# Altium PCB PCB_solderez.PcbDoc
Units mil, origin at the board's own origin, x right, y up, seen from the top; angles counter-clockwise.
Board outline 2995 x 1245 mil, 2 copper layers (Top Layer, Bottom Layer); 8 components, 11 nets, 53 pads, 0 vias.
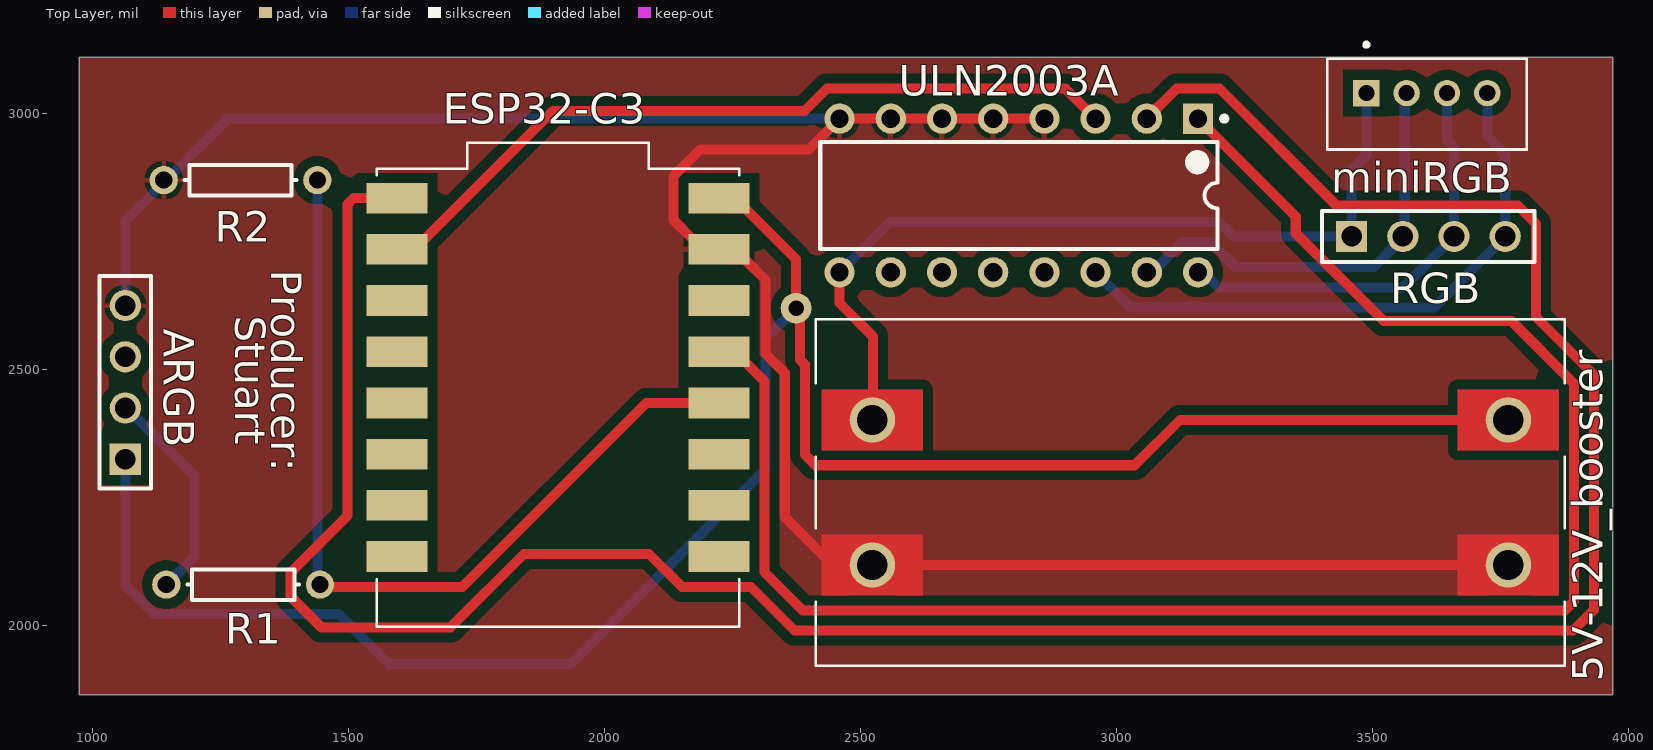
[diagram p0: Top Layer view]
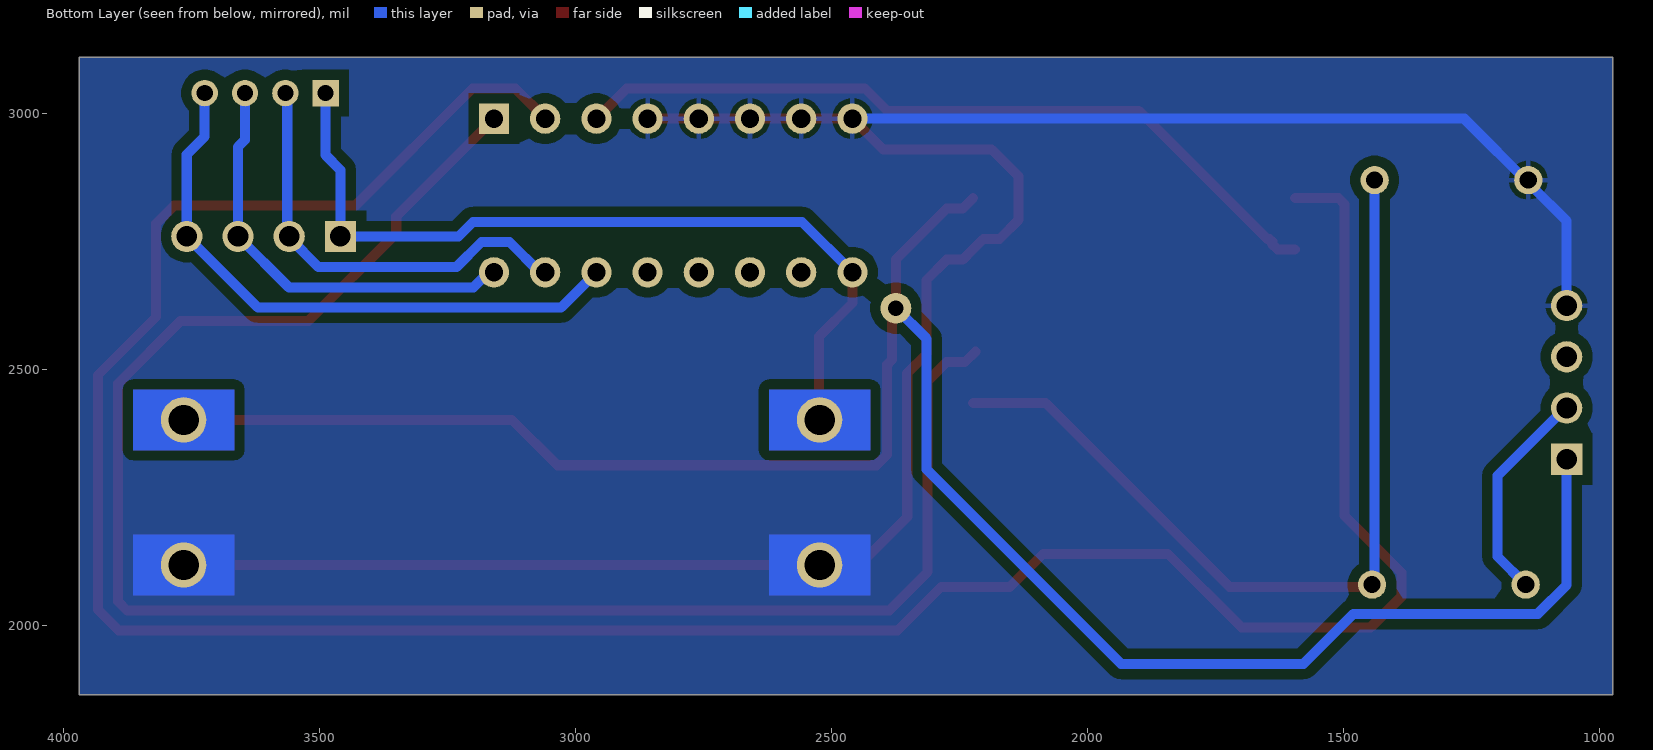
[diagram p1: Bottom Layer view, seen from below]

## Layer stack, top to bottom
Top Solder: solder mask 0.4, Solder Resist, Dk 3.5
Top Layer: signal copper 1.4
Dielectric 1: dielectric 12.6, FR-4, Dk 4.8
Bottom Layer: signal copper 1.4
Bottom Solder: solder mask 0.4, Solder Resist, Dk 3.5

## Board outline
975,1865 3970,1865 3970,3110 975,3110

## Design rules (kind name [scope] priority, off if disabled: settings)
Clearance [All] p1: gap=19.68 ignorepadtopadclearanceinfootprint=FALSE
PolygonConnect [All] p1: connectstyle=Relief reliefconductorwidth=10 reliefentries=4 polygonreliefangle="90 Angle" airgapwidth=10
RoutingVias [All] p1: holewidth=28 width=50 viastyle="Through Hole" minholewidth=28 minwidth=50 maxholewidth=28 maxwidth=50
SolderMaskExpansion [All] p1: expansion=4 istentingtop=FALSE
SupplyNets "Schematic Supply Nets" [InNet('GND')] p1: voltage=0.000
Width [All] p1: maxlimit=19.68 minlimit=19.68 preferedwidth=19.68 minimp=50.000000 maximp=50.000000 favimp=50.000000
30 further rules are at their usual default settings.

## Classes and differential pairs
component class Sheet1: ARGB ESP32-C3 miniRGB R1 R2 RGB ULN2003A

## Components (designator, comment, footprint, x,y, rotation, side; value= is the part's Value field where it differs from the comment)
5V-12V_booster "MT3608_DC-DC_STEP_UP_CONVERTER_2A_BOOSTER_MODULE" MODULE_MT3608_DC-DC_STEP_UP_CONVERTER_2A_BOOSTER_MODULE 3145,2260 r0 top
ARGB "TSW-104-08-T-S" SMTC-TSW-104-08-X-S 1065,2325 r90 top
ESP32-C3 "ESP32-C3_SUPERMINI_SMD" MODULE_ESP32-C3_SUPERMINI 1910,2445 r0 top
miniRGB "B4B-PH-K-S(LF)(SN)" JST_B4B-PH-K-S(LF)(SN) 3606.89,3018.35 r180 top
R1 "" AXIAL-0.3 1295,2080 r0 top value=1k
R2 "" AXIAL-0.3 1290,2870 r180 top value=2k
RGB "ARGB" SMTC-TSW-104-08-X-S 3460,2760 r0 top
ULN2003A "ULN2003A" STM-DIP-16L 2810,2840 r270 top

## Footprints (in the part's own frame and the unit in brackets; to place one, negate y for a bottom-side part, rotate by r counter-clockwise, add the part's x,y. Pads: shape width x height; smd on the part's side, far side on the other; paste and mask are expansions set on the pad)
AXIAL-0.3 [mm] "Axial Device, Thru-Hole; 2 Leads; 0.3 in Pin Spacing"
  round 1.4 hole 0.85: 1(-3.81,0) 2(3.81,0)
  silkscreen extent -2.77,-0.76 2.77,0.76
JST_B4B-PH-K-S(LF)(SN) [mm]
  rect 1.308x1.308 / inner round 1.308 / far side rect 1.308x1.308 hole 0.8: 1(3,-0.55)
  round 1.308 hole 0.8: 2(1,-0.55) 3(-1,-0.55) 4(-3,-0.55)
  silkscreen extent -4.95,-3.05 4.95,2.25, body extent -4.95,-2.25 4.95,2.25, height 6
MODULE_ESP32-C3_SUPERMINI [mm]
  rect 3.025x1.524 smd: 0(7.985,-7.88) 1(7.985,-5.34) 2(7.985,-2.8) 3(7.985,-0.26) 3.3(7.985,4.82) 4(7.985,2.28) 5(-7.985,9.9) 5V(7.985,9.9) 6(-7.985,7.36) 7(-7.985,4.82) 8(-7.985,2.28) 9(-7.985,-0.26) 10(-7.985,-2.8) 20(-7.985,-5.34) 21(-7.985,-7.88) G(7.985,7.36)
  silkscreen extent -9,-11.35 9,12.65
MODULE_MT3608_DC-DC_STEP_UP_CONVERTER_2A_BOOSTER_MODULE [mm]
  round 2.25 hole 1.5 mask+0: VIN_N(15.775,-3.6) VIN_P(15.775,3.6) VOUT_N(-15.775,-3.6) VOUT_P(-15.775,3.6)
  Top Layer region: 18.275,2.1 13.275,2.1 13.275,5.1 18.275,5.1
  Top Layer region: 18.275,-5.1 13.275,-5.1 13.275,-2.1 18.275,-2.1
  Top Layer region: -13.275,-5.1 -18.275,-5.1 -18.275,-2.1 -13.275,-2.1
  Top Layer region: -13.275,2.1 -18.275,2.1 -18.275,5.1 -13.275,5.1
  Bottom Layer region: 18.275,2.1 13.275,2.1 13.275,5.1 18.275,5.1
  Bottom Layer region: 18.275,-5.1 13.275,-5.1 13.275,-2.1 18.275,-2.1
  Bottom Layer region: -13.275,-5.1 -18.275,-5.1 -18.275,-2.1 -13.275,-2.1
  Bottom Layer region: -13.275,2.1 -18.275,2.1 -18.275,5.1 -13.275,5.1
  silkscreen extent -18.57,-8.6 18.57,8.6
SMTC-TSW-104-08-X-S [mm] ".025 SQ Post Terminal Strip Assembly, 1x4 Pins, Vertical, 2.54mm Pitch, Male"
  rect 1.55x1.55 hole 1.02: 1(0,0)
  round 1.55 hole 1.02: 2(2.54,0) 3(5.08,0) 4(7.62,0)
  silkscreen extent -1.46,-1.27 9.08,1.27, body extent -1.27,-1.27 8.89,1.27, height 8.38
STM-DIP-16L [mm] "DIP, 16-Leads, Body 19.7x7.1mm, Pitch 2.54mm"
  rect 1.5x1.5 hole 0.9: 1(-3.81,8.89)
  round 1.5 hole 0.9: 2(-3.81,6.35) 3(-3.81,3.81) 4(-3.81,1.27) 5(-3.81,-1.27) 6(-3.81,-3.81) 7(-3.81,-6.35) 8(-3.81,-8.89) 9(3.81,-8.89) 10(3.81,-6.35) 11(3.81,-3.81) 12(3.81,-1.27) 13(3.81,1.27) 14(3.81,3.81) 15(3.81,6.35) 16(3.81,8.89)
  silkscreen extent -3.93,-9.85 2.65,10.32, body extent -3.95,-9.85 3.95,9.85, height 5.33

## Part data
5V-12V_booster: "MT3608-based step-up converter boosts 2Vâ€“24V input to 28V with up to 93% efficiency. Suitable for devices needing higher voltage than the source.", Package=Package, Check_prices=https://www.snapeda.com/parts/MT3608%20DC-DC%20Step%20Up%20Converter%202A%20Booster%20Module/Generic/view-part/?ref=eda, MF=Generic, MP="MT3608 DC-DC Step Up Converter 2A Booster Module", SnapEDA_Link=https://www.snapeda.com/parts/MT3608%20DC-DC%20Step%20Up%20Converter%202A%20Booster%20Module/Generic/view-part/?ref=snap
ARGB: library part CMP-1024-00356-1, "0.025\" SQ Post Header, Through-hole, Vertical, -55 to 105 degC, 2.54 mm Pitch, 4-Pin, Male, RoHS", Manufacturer=Samtec, Temperature Range="-55 to 105 degC", ComponentLink1Description="Manufacturer URL", ComponentLink1URL=http://www.samtec.com, ComponentLink2Description=Datasheet, ComponentLink2URL=http://www.samtec.com/documents/webfiles/pdf/TSW_TH.PDF, ComponentLink3Description="Package Specification", ComponentLink3URL=http://www.samtec.com/documents/webfiles/cpdf/TSW-XXX-XX-XXX-X-XX-XXX-MKT.pdf, DatasheetVersion=F-214, Mounting Technology=Through-hole, Orientation=Vertical, PackageDescription=".025[0.64] SQ. Post Terminal Strip Assembly", PackageReference=TSW-104-08-X-S, PackageVersion="DM, 8/1988", PartNumber=TSW-104-08-T-S, Pitch="2.54 mm", RoHS=True
ESP32-C3: "Super tiny ESP32-C3 board", Package=None, Check_prices=https://www.snapeda.com/parts/ESP32-C3%20SuperMini_SMD/Espressif+Systems/view-part/?ref=eda, MF="Espressif Systems", MP="ESP32-C3 SuperMini_SMD", SnapEDA_Link=https://www.snapeda.com/parts/ESP32-C3%20SuperMini_SMD/Espressif+Systems/view-part/?ref=snap
miniRGB: "Connector Header Through Hole 4 position 0.079 (2.00mm)", Package=None, Check_prices=https://www.snapeda.com/parts/B4B-PH-K-S%20(LF)(SN)/JST/view-part/?ref=eda, MF="JST Sales", MP="B4B-PH-K-S (LF)(SN)", SnapEDA_Link=https://www.snapeda.com/parts/B4B-PH-K-S%20(LF)(SN)/JST/view-part/?ref=snap
R1 R2: library part Res1, "Resistor", LatestRevisionDate=17-Jul-2002, LatestRevisionNote="Re-released for DXP Platform.", PackageDescription="Axial Device, Thru-Hole; 2 Leads; 0.3 in Pin Spacing", PackageReference=AXIAL-0.3, Published=8-Jun-2000, Publisher="Altium Limited"
RGB: library part CMP-1024-00356-1, "0.025\" SQ Post Header, Through-hole, Vertical, -55 to 105 degC, 2.54 mm Pitch, 4-Pin, Male, RoHS", Manufacturer=Samtec, PartNumber=TSW-104-08-T-S, Temperature Range="-55 to 105 degC", ComponentLink1Description="Manufacturer URL", ComponentLink1URL=http://www.samtec.com, ComponentLink2Description=Datasheet, ComponentLink2URL=http://www.samtec.com/documents/webfiles/pdf/TSW_TH.PDF, ComponentLink3Description="Package Specification", ComponentLink3URL=http://www.samtec.com/documents/webfiles/cpdf/TSW-XXX-XX-XXX-X-XX-XXX-MKT.pdf, DatasheetVersion=F-214, Mounting Technology=Through-hole, Orientation=Vertical, PackageDescription=".025[0.64] SQ. Post Terminal Strip Assembly", PackageReference=TSW-104-08-X-S, PackageVersion="DM, 8/1988", Pitch="2.54 mm", RoHS=True
ULN2003A: library part CMP-2000-07351-1, "Seven Darlington Array, 50 V, 0.5 A, -40 to 85 degC, 16-Pin DIP, RoHS, Tube", Collector Emitter Voltage V(br)ceo=50V, DC Collector Current=500mA, DC Current Gain hFE=1000hFE, Manufacturer=STMicroelectronics, Operating Temperature Max=85°C, Output Current=0.5A, Package Description="16-Pin DIP, Body 19.7 x 7.1 mm, Pitch 2.54 mm", Package Reference=DIP-16L, Power Dissipation Pd=-, Transistor Case Style=DIP, Automotive Qualification Standard=-, Datasheet URL=http://www2.st.com/content/ccc/resource/technical/document/datasheet/f3/6e/c8/64/4d/b3/4e/38/CD00001244.pdf/files/CD00001244.pdf/jcr:content/translations/en.CD00001244.pdf, Datasheet Version="Rev. 8, 06/2012", Manufacturer URL=http://www.st.com/, Mounting Technology=ThroughHole, MSL=MSL2-1year, No. of Pins=16Pins, PartNumber=ULN2003A, Product Range=-, SVHC=NoSVHC(17-Dec-2015), Transistor Polarity=NPN, VOUT=50V

## Free pads (board coordinates)
  round 60 hole 30: 17(2375,2620)

## Nets (pads, with @x,y where several pads share a name; then routed paths per layer and width w, separated by ;. In a path a pad name is that pad's centre, name@x,y a point inside that pad or via, vN(x,y) a via of type N, cw(c..) or ccw(c..) an arc to the next point about the centre after c; other vN are vias at no path point)
5V: 5V-12V_booster.VIN_P ARGB.1 ESP32-C3.5V pad.17 | length 4064.6
  Top Layer w19.68: ESP32-C3.5V 2244.53,2814.61 2275.83,2814.61 2375,2715.44 pad.17 2382.71,2612.29 2382.71,2519.08 2392.18,2509.61 2392.18,2359.92 2392.18,2334.25 2413.28,2313.15 2443.74,2313.15 3036.06,2313.15 3124.64,2401.73 5V-12V_booster.VIN_P
  Bottom Layer w19.68: ARGB.1 1065,2079.27 1121.35,2022.91 1481.35,2022.91 1579.27,1925 1935,1925 2315,2305 2315,2560 pad.17
12V: 5V-12V_booster.VOUT_P miniRGB.1 RGB.1 ULN2003A.9 | length 1660.1
  Top Layer w19.68: ULN2003A.9 2460,2630 2525,2565 2525,2402.8 5V-12V_booster.VOUT_P
  Bottom Layer w19.68: ULN2003A.9 2558.43,2788.43 3200.77,2788.43 3229.19,2760 RGB.1 3460,2890 3488.78,2918.78 miniRGB.1
B: miniRGB.4 RGB.4 ULN2003A.14 | length 1180.5
  Bottom Layer w19.68: ULN2003A.14 3028.78,2621.22 3621.22,2621.22 RGB.4 3760,2920 3725,2955 miniRGB.4
DATA_3.3: ESP32-C3.3 R1.2 R2.1 | length 1709.4
  Top Layer w19.68: R1.2 1449.76,2075.24 1723.09,2075.24 2082.61,2434.76 ESP32-C3.3
  Bottom Layer w19.68: R2.1@1435,2855 1440,2850 1440,2085 R1.2
DATA_5: ARGB.2 R1.1 | length 425.3
  Bottom Layer w19.68: ARGB.2 1067.78,2425 1200,2292.78 1200,2135 R1.1
G: miniRGB.2 RGB.2 ULN2003A.15 | length 854.4
  Bottom Layer w19.68: ULN2003A.15 3070.65,2690 3129.71,2749.06 3184.46,2749.06 3233.56,2699.96 3502.74,2699.96 3560,2757.22 RGB.2 3563.76,2763.76 3563.76,3036.24 miniRGB.2
GND: 5V-12V_booster.VIN_N 5V-12V_booster.VOUT_N ARGB.4 ESP32-C3.G R2.2 ULN2003A.4 ULN2003A.5 ULN2003A.6 ULN2003A.7 ULN2003A.8 | length 4658.1
  Top Layer w19.68: ULN2003A.4 ULN2003A.5 ULN2003A.6 ULN2003A.7 ULN2003A.8 2399.73,2929.73 2188.03,2929.73 2135.3,2876.99 2135.3,2792.53 2172.91,2754.92 2204.21,2754.92 ESP32-C3.G 2244.53,2714.61 2275.83,2714.61 2315.47,2674.97 2315.47,2530.64 2352.81,2493.3 2352.81,2376.23 2352.81,2212.19 2446.73,2118.27 5V-12V_booster.VOUT_N 5V-12V_booster.VIN_N
  Bottom Layer w19.68: ARGB.4 1065,2790 1132.5,2857.5 1265,2990 ULN2003A.8
out4: ESP32-C3.4 ULN2003A.1 | length 3502.3
  Top Layer w19.68: ESP32-C3.4@2219.77,2534.76 2239.93,2514.61 2275.83,2514.61 2313.44,2476.99 2313.44,2392.53 2313.44,2104.3 2388.06,2029.69 3876.72,2029.69 3894.02,2046.98 3894.02,2473.02 3771.9,2595.14 3522.08,2595.14 3350.88,2766.34 3350.88,2799.12 ULN2003A.1
out5: ESP32-C3.5 ULN2003A.2 | length 5317.7
  Top Layer w19.68: ESP32-C3.5 1595.39,2835 1510.67,2835 1499.14,2823.47 1499.14,2214.88 1387.91,2103.65 1387.91,2056.35 1447.77,1996.5 1700.02,1996.5 1843.53,2140 2087.83,2140 2152.59,2075.24 2286.83,2075.24 2371.76,1990.32 3893.03,1990.32 3933.39,2030.67 3933.39,2489.33 3820.04,2602.67 3820.04,2784.87 3784.87,2820.04 3430.77,2820.04 3201.76,3049.06 3118.24,3049.06 ULN2003A.2@3060,2990.81
out6: ESP32-C3.6 ULN2003A.3 | length 1521.7
  Top Layer w19.68: ESP32-C3.6 1629.76,2734.76 1640,2745 1640,2749.59 1645.33,2754.92 1649.92,2754.92 1900,3005 2391.48,3005 2435.54,3049.06 2900.94,3049.06 ULN2003A.3
R: miniRGB.3 RGB.3 ULN2003A.16 | length 839
  Bottom Layer w19.68: ULN2003A.16 3170.65,2690 3200.06,2660.59 3560.59,2660.59 RGB.3 3660,2935 3646.26,2948.74 miniRGB.3
pads on no net: ARGB.3 ESP32-C3.0 ESP32-C3.1 ESP32-C3.2 ESP32-C3.3.3 ESP32-C3.7 ESP32-C3.8 ESP32-C3.9 ESP32-C3.10 ESP32-C3.20 ESP32-C3.21 ULN2003A.10 ULN2003A.11 ULN2003A.12 ULN2003A.13

## Polygon pours and split planes (outlines as drawn)
GND on Bottom Layer "NONET_L-01_P-001" (solid, remove dead copper, pour order 1): 975,3110 3970,3110 3970,1865 975,1865
GND on Top Layer "NONET_L-01_P-001" (solid, remove dead copper, pour order 2): 975,3110 3970,3110 3970,1865 975,1865

## Silkscreen, mask and mechanical layers (free items; w line width, h text height)
Top Overlay:
  text "Producer:" at 1350,2695 h60 r270
  text "Stuart" at 1280,2605 h60 r270
Mechanical 1:
  lines w47.24: 975,1865 975,3110 ; 975,1865 3970,1865 ; 975,1865 975,3110 ; 975,1865 3970,1865 ; 975,3110 3970,3110 ; 975,3110 3970,3110 ; 3970,1865 3970,3110 ; 3970,1865 3970,3110

## Text inside footprints (layer, text, board x,y; h text height)
5V-12V_booster: Mechanical 13 "VOUT_N" at 2436.34,1984.41 h50; Mechanical 13 "VOUT_P" at 2436.34,2486.38 h50; Mechanical 13 "VIN_N" at 3656.81,1984.41 h50; Mechanical 13 "VIN_P" at 3656.81,2486.38 h50